# Altium PCB Copy of TLSR8258_Module.PcbDoc
Units mil, origin at the board's own origin, x right, y up, seen from the top; angles counter-clockwise.
Board outline 866.14 x 1259.84 mil, 2 copper layers (Top Layer, Bottom Layer); 29 components, 32 nets, 127 pads, 0 vias.
Unrouted connection lines stored in the file: 69.
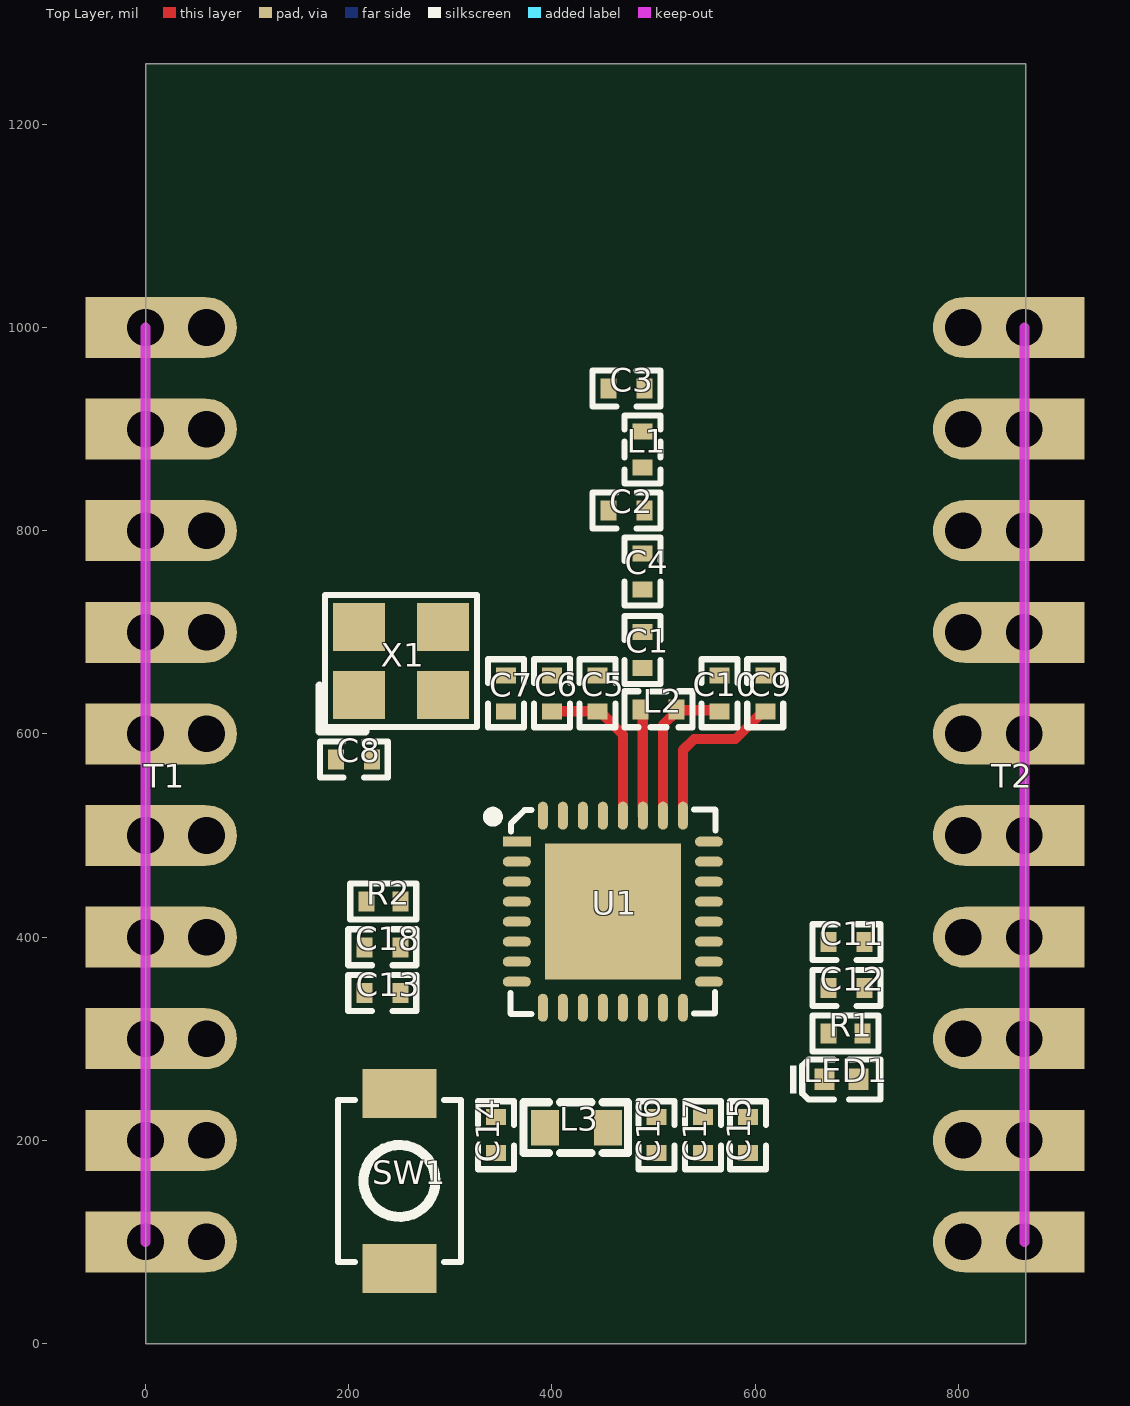
[diagram p0: Top Layer view]
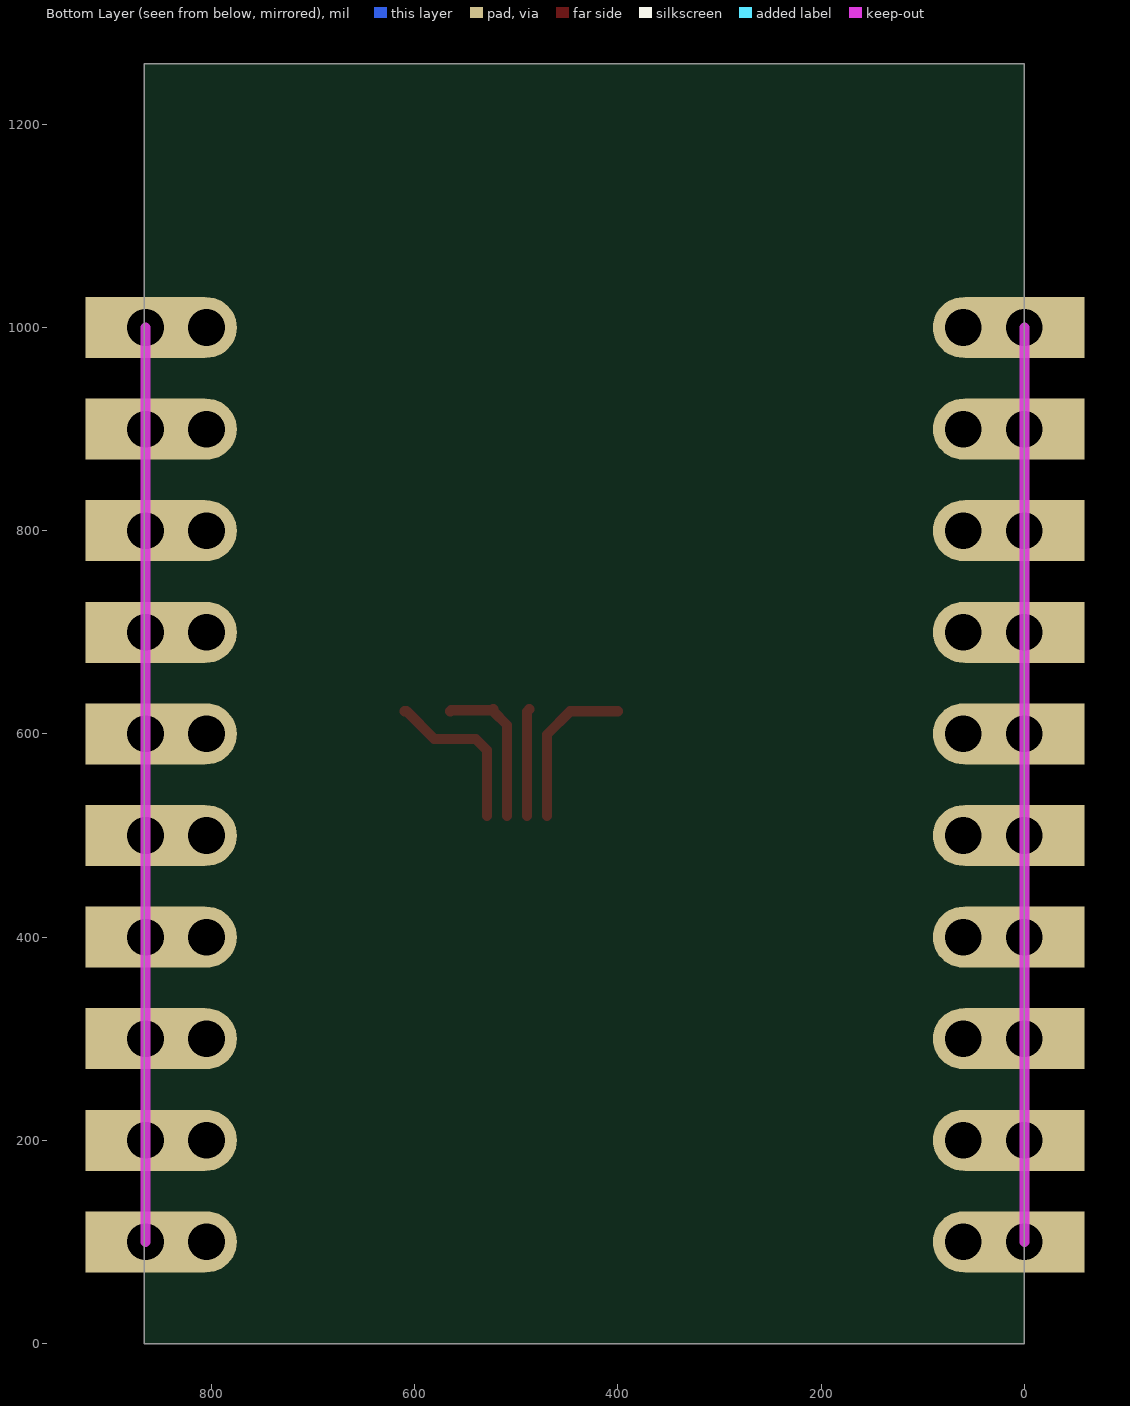
[diagram p1: Bottom Layer view, seen from below]

## Layer stack, top to bottom
Top Solder: solder mask 0.4, Solder Resist, Dk 3.5
Top Layer: signal copper 1.4
Dielectric 1: dielectric 12.6, FR-4, Dk 4.8
Bottom Layer: signal copper 1.4
Bottom Solder: solder mask 0.4, Solder Resist, Dk 3.5

## Board outline
0,0 0,1259.84 866.14,1259.84 866.14,0

## Design rules (kind name [scope] priority, off if disabled: settings)
Clearance [All] p1: gap=6 ignorepadtopadclearanceinfootprint=FALSE
PolygonConnect [All] p1: connectstyle=Relief reliefconductorwidth=10 reliefentries=4 polygonreliefangle="90 Angle" airgapwidth=10
RoutingVias [All] p1: holewidth=28 width=50 viastyle="Through Hole" minholewidth=28 minwidth=50 maxholewidth=28 maxwidth=50
SolderMaskExpansion [All] p1: expansion=4 istentingtop=FALSE
SupplyNets "Schematic Supply Nets_1" [InNet('TL_VDD_3V')] p1: voltage=0.000
SupplyNets "Schematic Supply Nets" [InNet('GND')] p2: voltage=0.000
Width [All] p1: maxlimit=20 minlimit=6 preferedwidth=6
30 further rules are at their usual default settings.

## Components (designator, comment, footprint, x,y, rotation, side; value= is the part's Value field where it differs from the comment)
C1 "2.7pF" "C 0402_L" 489.25,682.72 r90 top
C2 "2pF" "C 0402_L" 473.51,820 r0 top
C3 "0.5pF" "C 0402_L" 473.51,940 r0 top
C4 "220pF" "C 0402_L" 489.25,760 r90 top
C5 "2.2uF" "C 0402_L" 445,640 r270 top
C6 "100nF" "C 0402_L" 400,640 r270 top
C7 "NC" "C 0402_L" 355,640 r90 top
C8 "NC" "C 0402_L" 205,575 r0 top
C9 "1uF" "C 0402_L" 610,640 r270 top
C10 "18pF" "C 0402_L" 565,640 r90 top
C11 "100nF" "C 0402_L" 690,395 r180 top
C12 "1uF" "C 0402_L" 690,350 r180 top
C13 "1uF" "C 0402_L" 233.04,345 r0 top
C14 "1uF" "C 0402_L" 345,205 r90 top
C15 "1uF" "C 0402_L" 592.8,205 r90 top
C16 "100nF" "C 0402_L" 503.09,205 r90 top
C17 "1uF" "C 0402_L" 548.63,205 r90 top
C18 "100nF" "C 0402_L" 233.04,390 r0 top
L1 "3.3nH" "L 0402" 489.26,880 r270 top
L2 "1.3nH" "L 0402" 505,624.25 r180 top
L3 "6.8uH" "L 0603" 424,212.46 r180 top
LED1 "LED" LED0402-RD 685,260 r0 top
R1 "1K" "R 0402_L" 690,305 r180 top
R2 "10K" "R 0402_L" 235,435 r180 top
SW1 "TS-1088R-02026" SW-SMD_L3.9-W3.0-P4.45 250,160 r90 top
T1 "Semihole_1x6" SEMIHOLE_1x10 0,1000 r90 top
T2 "Semihole_1x6" SEMIHOLE_1x10 865,100 r270 top
U1 "TLSR8656F512ET32" "QFN32 5x5_L" 460,425 r270 top
X1 "TAXM24M4ZFBCCT2T" "OSC 3225-4P" 251.47,671.57 r0 top

## Footprints (in the part's own frame and the unit in brackets; to place one, negate y for a bottom-side part, rotate by r counter-clockwise, add the part's x,y. Pads: shape width x height; smd on the part's side, far side on the other; paste and mask are expansions set on the pad)
"C 0402_L" [mm] "无极性贴片电容         淘宝ID:黄晶宝石"
  rect 0.4x0.5 smd: 1(-0.45,0) 2(0.45,0)
  silkscreen extent -0.85,-0.45 0.85,0.45, body extent -0.5,-0.26 0.5,0.26, height 0.53
"L 0402" [mm] "小功率贴片电感"
  rect 0.4x0.5 smd: 1(-0.45,0) 2(0.45,0)
  silkscreen extent -0.85,-0.45 0.85,0.45, body extent -0.5,-0.25 0.5,0.25, height 0.5
"L 0603" [mil] "小功率贴片电感"
  rect 27.56x35 smd: 1(-31,0) 2(31,0)
  silkscreen extent -51,-25 52,25, body extent -31,-16 31,16, height 31
LED0402-RD [mm]
  rect 0.5x0.54 smd paste+0.051: 1(-0.425,0) 2(0.425,0)
  silkscreen extent -1.28,-0.5 0.98,0.5
"OSC 3225-4P" [mm] "3.2*2.5*0.7mm(长宽高)                         淘宝ID:黄晶宝石"
  rect 1.3x1.2 smd: 1(-1.05,-0.85) 2(1.05,-0.85) 3(1.05,0.85) 4(-1.05,0.85)
  silkscreen extent -2.03,-1.75 1.91,1.65, body extent -1.6,-1.25 1.6,1.25, height 0.7
"QFN32 5x5_L" [mm] "32脚，长：5mm，宽：5mm，高：9.5mm"
  rect 0.25x0.7 smd: 1(-1.751,-2.4)
  oval 0.25x0.7 smd: 2(-1.25,-2.4) 3(-0.75,-2.4) 4(-0.25,-2.4) 5(0.25,-2.4) 6(0.75,-2.4) 7(1.25,-2.4) 8(1.75,-2.4) 17(1.75,2.4) 18(1.25,2.4) 19(0.75,2.4) 20(0.25,2.4) 21(-0.25,2.4) 22(-0.75,2.4) 23(-1.25,2.4) 24(-1.75,2.4)
  oval 0.7x0.25 smd: 9(2.4,-1.75) 10(2.4,-1.25) 11(2.4,-0.75) 12(2.4,-0.25) 13(2.4,0.25) 14(2.4,0.75) 15(2.4,1.25) 16(2.4,1.75) 25(-2.4,1.75) 26(-2.4,1.25) 27(-2.4,0.75) 28(-2.4,0.25) 29(-2.4,-0.25) 30(-2.4,-0.75) 31(-2.4,-1.25) 32(-2.4,-1.75)
  rect 3.4x3.4 smd: 33(0,0)
  silkscreen extent -2.55,-3.12 2.55,2.57, body extent -2.5,-2.5 2.5,2.5, height 0.93
"R 0402_L" [mm] "1/16W贴片电阻     淘宝ID:黄晶宝石"
  rect 0.4x0.5 smd: 1(-0.4,0) 2(0.45,0)
  silkscreen extent -0.8,-0.45 0.85,0.45, body extent -0.5,-0.25 0.5,0.25, height 0.3
SEMIHOLE_1x10 [mil] "半孔，10脚"
  rect 60x118.11 hole 36 paste-99999 mask+5: 1(0,0) 2(-100,0) 3(-200,0) 4(-300,0) 5(-400,0) 6(-500,0) 7(-600,0) 8(-700,0) 9(-800,0) 10(-900,0)
  round 60 hole 36 paste-99999 mask+5: 1(0,-60) 2(-100,-60) 3(-200,-60) 4(-300,-60) 5(-400,-60) 6(-500,-60) 7(-600,-60) 8(-700,-60) 9(-800,-60) 10(-900,-60)
  Keep-Out Layer lines w10: -900,0 0,0
SW-SMD_L3.9-W3.0-P4.45 [mm]
  rect 1.23x1.86 smd paste+0.051: 1(-2.185,0) 2(2.185,0)
  silkscreen extent -2.03,-1.54 2.03,1.54

## Part data
C1 C2 C3 C4 C5 C6 C7 C8 C9 C10 C11 C12 C13 C14 C15 C16 C17 C18: library part C, "贴片电容"
L1 L2 L3: library part L, "小功率贴片电感"
R1 R2: library part R, "贴片电阻"
SW1: "电路结构:单刀单掷;按钮形状:圆形按钮;作用力:2.6N;安装方式:立贴;开关长度:3.9mm;开关宽度:2.93mm;开关高度:2mm;带支架:不带支架;触点电流:50mA;额定电压:12V;带灯:-;工作寿命:10万次;", Actuator/Cap Color=黑色, Contact Current=50mA, JLCPCB Part Class="Extended Part", LCSC Part Name="3.9*2.93*2mm 立贴 轻触开关", Manufacturer=XUNPU(讯普), Operating Force=2.6N, Voltage Rating=12V, Actuator Style=圆形按钮, AddInBom=yes, Circuit=单刀单掷, ConvertToPcb=yes, Datasheet=https://item.szlcsc.com/datasheet/TS-1088R-02026/457635.html, Device=TS-1088R-02026, FootprintName=SW-SMD_L3.9-W3.0-P4.45, Length=3.9mm, Life=10万次, ManufacturerPart=TS-1088R-02026, ModelId=b26698b69f274ffabef8a26c7d0e5dd1聨0819f05c4eef4c71ace90d822a990e87, ModelName=SW-SMD_L3.9-W2.9-H2.0-LS4.8, ModelTransform=188.976,114.174,0,0,0,0,0,0,0, Mounting Type=立贴, Supplier=LCSC, Supplier Footprint=SMD,4x3mm, SupplierPart=C455280, Switch Height=2mm, Symbol=TS-1088R-02026, Termination Style=SMD接片, Width=2.93mm, with Bracket=不带支架, With Lamp=-
T1 T2: library part Semihole_1x10
X1: library part XTAL-4P, "4脚无源晶振(24M)"

## Nets (pads, with @x,y where several pads share a name; then routed paths per layer and width w, separated by ;. In a path a pad name is that pad's centre, name@x,y a point inside that pad or via, vN(x,y) a via of type N, cw(c..) or ccw(c..) an arc to the next point about the centre after c; other vN are vias at no path point)
ANT_PCB: C3.2 L1.1
GND: C1.1 C2.1 C3.1 C5.1 C6.1 C7.1 C8.1 C9.1 C10.2 C11.1 C12.1 C13.1 C14.1 C15.1 C16.1 C17.1 C18.1 SW1.1 T2.1 U1.7 U1.33 X1.2 X1.4
NetC1_2: C1.2 C4.1 L2.2 U1.27 | length 105.7
  Top Layer w10: L2.2 489.46,622.09 489.46,519.58 U1.27
NetC2_2: C2.2 C4.2 L1.2
NetC9_2: C9.2 U1.25 | length 161.4
  Top Layer w10: U1.25 528.92,583.92 540,595 580.74,595 608.03,622.29 C9.2
NetC10_1: C10.1 L2.1 U1.26 | length 153.4
  Top Layer w10: U1.26 509.23,608.79 522.72,622.28 L2.1 523.7,623.27 564.01,623.27 C10.1
NetC13_2: C13.2 U1.8
NetC15_2: C15.2 U1.13
NetL3_1: L3.1 U1.11
NetL3_2: L3.2 U1.10
NetLED1_2: LED1.2 R1.1
TL_PA0: T1.6 U1.3
TL_PA1: C18.2 R2.1 SW1.2 T1.7 U1.4
TL_PB1: T1.9 U1.6
TL_PB4: LED1.1 T2.2 U1.14
TL_PB5: T2.3 U1.15
TL_PB6: T2.4 U1.16
TL_PB7: T2.5 U1.17
TL_PC0: T2.6 U1.20
TL_PC1: T2.7 U1.21
TL_PC2: T2.8 U1.22
TL_PC3: T2.9 U1.23
TL_PC4: T2.10 U1.24
TL_PD2: T1.2 U1.31
TL_PD3: T1.3 U1.32
TL_PD4: T1.4 U1.1
TL_PD7: T1.5 U1.2
TL_SWS: T1.8 U1.5
TL_VDD_1V2: C5.2 C6.2 C16.2 C17.2 T1.1 U1.12 U1.28 | length 157.3
  Top Layer w10: C6.2 C5.2 ; C5.2@446.97,622.29 469.85,599.41 U1.28
TL_VDD_3V: C11.2 C12.2 C14.2 R1.2 R2.2 T1.10 U1.9 U1.18 U1.19
TL_XC1: C7.2 U1.29 X1.3
TL_XC2: C8.2 U1.30 X1.1

## Silkscreen, mask and mechanical layers (free items; w line width, h text height)
Mechanical 1:
  the board outline again, w10